# Altium PCB Jetson Nano Power -2.PcbDoc
Units mm, origin at the board's own origin, x right, y up, seen from the top; angles counter-clockwise.
Board outline 84.58 x 60.07 mm, 2 copper layers (Top Layer, Bottom Layer); 11 components, 10 nets, 32 pads, 0 vias.
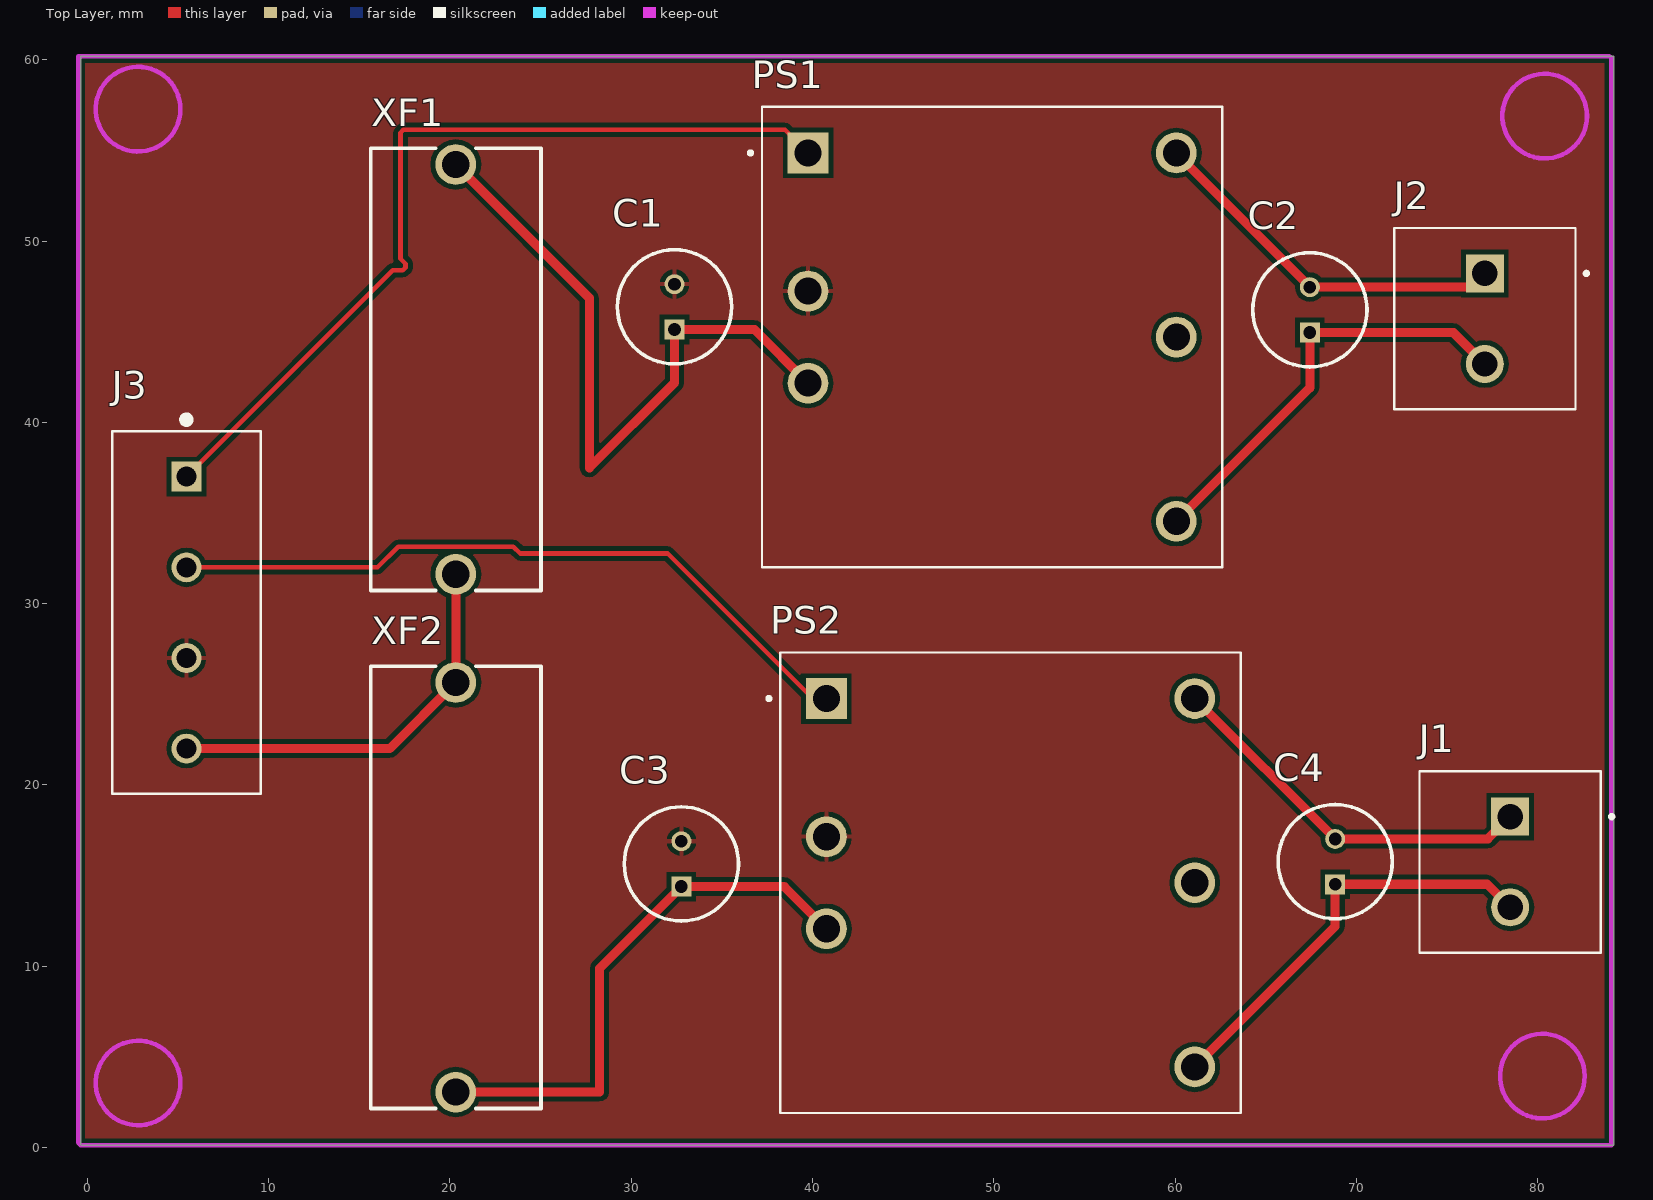
[diagram p0: Top Layer view]
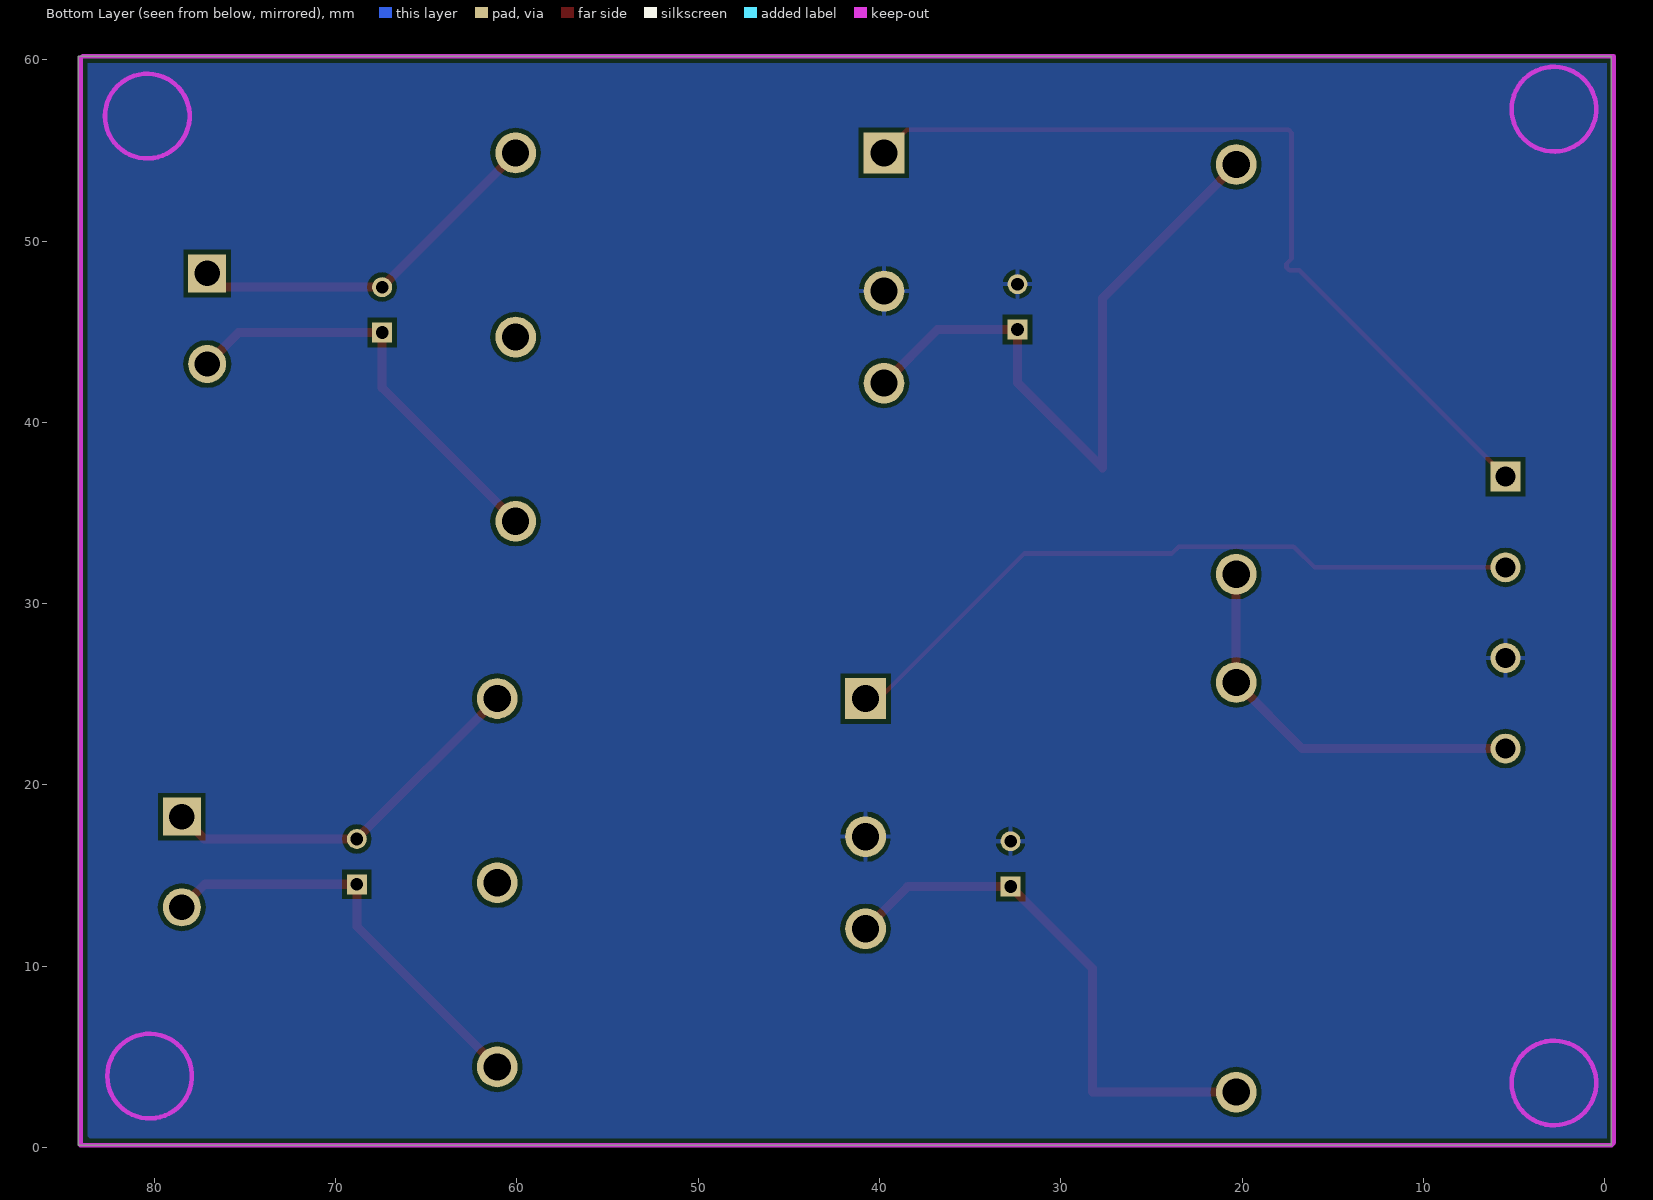
[diagram p1: Bottom Layer view, seen from below]
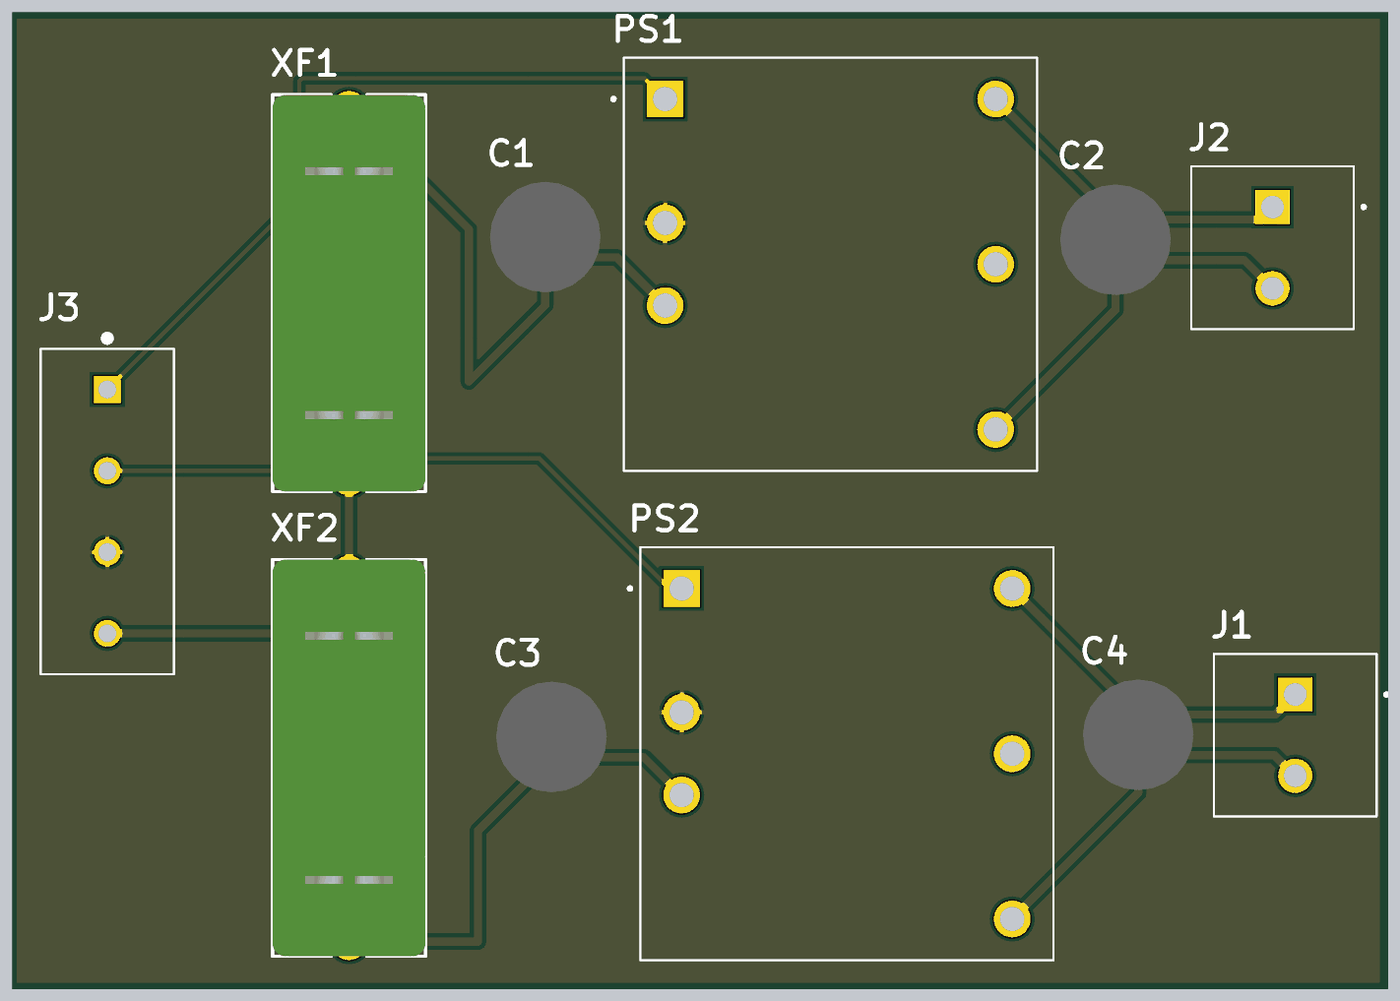
[diagram p2: 3D render of the assembled board from above, using the file's embedded part models]

## Layer stack, top to bottom
Top Solder: solder mask 0.0102, Solder Resist, Dk 3.5
Top Layer: signal copper 0.0356
Dielectric 1: dielectric 0.32, FR-4, Dk 4.8
Bottom Layer: signal copper 0.0356
Bottom Solder: solder mask 0.0102, Solder Resist, Dk 3.5

## Board outline
-0.381,0.127 84.201,0.127 84.201,60.198 -0.381,60.198

## Design rules (kind name [scope] priority, off if disabled: settings)
Clearance [All] p1: gap=0.254 ignorepadtopadclearanceinfootprint=FALSE except(0: SMDPad-Hole THPad-Hole Via-Hole Fill-Hole Poly-Hole Region-Hole Text-Hole)
PolygonConnect [All] p1: connectstyle=Relief reliefconductorwidth=0.254 reliefentries=4 polygonreliefangle="90 Angle" airgapwidth=0.254
RoutingVias [All] p1: holewidth=0.711 width=1.27 viastyle="Through Hole" minholewidth=0.711 minwidth=1.27 maxholewidth=0.711 maxwidth=1.27
SolderMaskExpansion [All] p1: expansion=0.102 istentingtop=FALSE
Width [All] p1: maxlimit=0.5 minlimit=0.254 preferedwidth=0.5 minimp=50.000000 maximp=50.000000 favimp=50.000000
30 further rules are at their usual default settings.

## Classes and differential pairs
component class "Jetson Nano Power -2": J1 J2 J3 PS1 PS2 XF1 XF2

## Components (designator, comment, footprint, x,y, rotation, side; value= is the part's Value field where it differs from the comment)
C1 "ESK107M016AE3AA" CAPPRD250W50D630H1250 32.385,45.125 r90 top
C2 "ESK107M016AE3AA" CAPPRD250W50D630H1250 67.437,44.958 r90 top
C3 "ESK107M016AE3AA" CAPPRD250W50D630H1250 32.766,14.391 r90 top
C4 "ESK107M016AE3AA" CAPPRD250W50D630H1250 68.834,14.518 r90 top
J1 "282856-2" *TE_282856-2 78.486,15.748 r270 top
J2 "282856-2" *TE_282856-2 77.089,45.72 r270 top
J3 "282836-4" *TE_282836-4 5.461,29.504 r270 top
PS1 "PDQE20-Q24-S5-D" *CONV_PDQE20-Q24-S5-D 49.911,44.704 r0 top
PS2 "PDQE20-Q24-S5-D" *CONV_PDQE20-Q24-S5-D 50.927,14.605 r0 top
XF1 "696108003002" 696108003002 20.32,42.926 r90 top
XF2 "696108003002" 696108003002 20.32,14.351 r270 top

## Footprints (in the part's own frame and the unit in brackets; to place one, negate y for a bottom-side part, rotate by r counter-clockwise, add the part's x,y. Pads: shape width x height; smd on the part's side, far side on the other; paste and mask are expansions set on the pad)
696108003002 [mm] "FUSEHOLDER BLOCKS - PCB - CLIP COVER - THT"
  round 2.25 hole 1.5: 1(-11.3,0) 2(11.3,0)
  silkscreen extent -12.2,-4.7 12.2,4.7, body extent -12.2,-4.7 12.2,4.7, height 11.55
*CONV_PDQE20-Q24-S5-D [mm]
  rect 2.25x2.25 hole 1.5: 1(-10.16,10.16)
  round 2.25 hole 1.5: 2(-10.16,2.54) 3(-10.16,-2.54) 4(10.16,-10.16) 5(10.16,0) 6(10.16,10.16)
  silkscreen extent -13.43,-12.7 12.7,12.7
*TE_282836-4 [mm]
  rect 1.65x1.65 hole 1.1: 1(-7.5,0)
  round 1.65 hole 1.1: 2(-2.5,0) 3(2.5,0) 4(7.5,0)
  silkscreen extent -10.84,-4.1 10,4.1
*TE_282856-2 [mm]
  rect 2.1x2.1 hole 1.4: 1(-2.5,0)
  round 2.1 hole 1.4: 2(2.5,0)
  silkscreen extent -5,-5 5,5.7
CAPPRD250W50D630H1250 [mm]
  rect 1.1x1.1 hole 0.7: 1(0,0)
  round 1.1 hole 0.7: 2(2.5,0)
  silkscreen extent -1.9,-3.15 4.4,3.15, body extent -2.15,-3.4 4.65,3.4, height 12.5

## Part data
C1 C2 C3 C4: "Capacitor Polarised", Manufacturer_Name=Kemet, Datasheet Link=https://api.kemet.com/component-edge/download/datasheet/ESK107M016AE3AA.pdf, Height=12.5mm, Manufacturer_Part_Number=ESK107M016AE3AA
J1 J2: "TERMI-BLOK PCB MOUNT 2P", Package=None, Availability=Unavailable, EU_RoHS_Compliance="Compliant with Exemptions", MF="TE Connectivity", MP=282856-2, Price=None, SnapEDA_Link=https://www.snapeda.com/parts/282856-2/TE%20Connectivity%20AMP%20Connectors/view-part/1809079/?ref=snap, TE_purchase_URL=https://www.te.com/usa-en/product-282856-2.html?te_bu=Cor&te_type=disp&te_campaign=seda_glo_cor-seda-global-disp-prtnr-fy19-seda-model-bom-cta_sma-317_1&elqCampaignId=32493
J3: "4 Position Wire to Board Terminal Block Horizontal with Board 0.197 _5.00mm_ Through Hole", Package=None, Availability=Unavailable, Centerline_Pitch="5 mm[.197 in]", EU_RoHS_Compliance="Compliant with Exemptions", MF="TE Connectivity", MP=282836-4, Number_of_Positions=4, Price=None, SnapEDA_Link=https://www.snapeda.com/parts/282836-4/TE%20Connectivity%20AMP%20Connectors/view-part/493249/?ref=snap, TE_purchase_URL=https://www.te.com/usa-en/product-282836-4.html?te_bu=Cor&te_type=disp&te_campaign=seda_glo_cor-seda-global-disp-prtnr-fy19-seda-model-bom-cta_sma-317_1&elqCampaignId=32493
PS1 PS2: "20 W, 4:1 Input Range, Single/Dual Regulated Output, DIP, 1500 Vdc Isolation, Dc-Dc Converter", Package="DIP-6 CUI Inc.", CUI_purchase_URL=https://www.cui.com/product/dc-dc-converters/isolated/pdqe20-d-series?utm_source=snapeda.com&utm_medium=referral&utm_campaign=snapedaBOM, Digi-Key_Part_Number=102-6267-ND, Digi-Key_Purchase_URL=https://www.digikey.com/product-detail/en/cui-inc/PDQE20-Q24-S5-D/102-6267-ND/10230156?utm_source=snapeda&utm_medium=aggregator&utm_campaign=symbol, MF="CUI Inc.", MP=PDQE20-Q24-S5-D, SnapEDA_Link=https://www.snapeda.com/parts/PDQE20-Q24-S5-D/CUI/view-part/3740268/?ref=snap
XF1 XF2: library part CMP-1502-00237-1, "WR-FSH Fuse Holder Blocks Fuse Holder Blocks Clip Cover for PCB", Manufacturer="Wurth Elektronik", Operating Temperature=-30to120degC, Datasheet URL=https://katalog.we-online.de/em/datasheet/696108003002.pdf, Fuse Size=5x20mm, Manufacturer URL=http://www.we-online.de, Mounting Technology=THT, Package Reference=696108003002, Packaging=Box, Part Number=696108003002, Publisher=WurthElektronik

## Nets (pads, with @x,y where several pads share a name; then routed paths per layer and width w, separated by ;. In a path a pad name is that pad's centre, name@x,y a point inside that pad or via, vN(x,y) a via of type N, cw(c..) or ccw(c..) an arc to the next point about the centre after c; other vN are vias at no path point)
GND: C1.2 C3.2 J3.3 PS1.2 PS2.2 | length 0.7
  Top Layer w0.254: J3.3@5.351,26.894 J3.3 ; PS1.2@39.664,47.331 PS1.2 PS1.2@40.132,47.244 ; PS2.2@39.981,17.169 PS2.2@40.005,17.145
NetC1_1: C1.1 PS1.3 XF1.2 | length 38
  Top Layer w0.5: XF1.2 27.686,46.86 27.686,37.487 32.385,42.186 C1.1 36.79,45.125 PS1.3
NetC2_1: C2.1 J2.2 PS1.4 | length 23.8
  Top Layer w0.5: PS1.4 67.437,41.91 C2.1 75.351,44.958 J2.2
NetC2_2: C2.2 J2.1 PS1.6 | length 20.4
  Top Layer w0.5: PS1.6 60.071,54.844 67.437,47.478 C2.2 76.327,47.458 J2.1
NetC3_1: C3.1 PS2.3 XF2.2 | length 30.1
  Top Layer w0.5: XF2.2 28.244,3.051 28.244,9.869 C3.1 38.441,14.391 PS2.3
NetC4_1: C4.1 J1.2 PS2.4 | length 23.5
  Top Layer w0.5: PS2.4 68.834,12.192 C4.1 77.21,14.518 78.48,13.248 J1.2
NetC4_2: C4.2 J1.1 PS2.6 | length 21.1
  Top Layer w0.5: PS2.6 C4.2 77.256,17.018 J1.1
NetJ3_1: J3.1 PS1.1 | length 47.5
  Top Layer w0.254: J3.1 16.844,48.387 17.399,48.387 17.548,48.536 17.548,48.746 17.272,49.022 17.272,55.985 17.421,56.134 38.481,56.134 PS1.1
NetJ3_2: J3.2 PS2.1 | length 38.5
  Top Layer w0.254: J3.2 16.002,32.004 17.145,33.147 23.495,33.147 23.876,32.766 32.004,32.766 PS2.1@40.005,24.765
NetJ3_4: J3.4 XF1.1 XF2.1 | length 22.3
  Top Layer w0.5: J3.4 16.673,22.004 XF2.1 XF1.1
pads on no net: PS1.5 PS2.5

## Polygon pours and split planes (outlines as drawn)
GND on Top Layer "GND_L01_P001" (solid, pour order 1): -0.381,60.325 84.074,60.325 84.201,60.198 84.201,0 0,0 -0.381,0.381
GND on Bottom Layer "GND bottom" (solid, pour order 2): -0.254,59.944 -0.127,59.817 83.693,59.817 83.693,0.635 83.566,0.508 -0.254,0.508 -0.254,4.953 -0.762,5.461 -0.127,5.461

## Keep-outs
Keep-Out Layer:
  circle w0.254: c80.391,56.896 r2.335
  circle w0.254: c80.264,3.937 r2.335
  circle w0.254: c2.794,3.556 r2.335
  circle w0.254: c2.794,57.277 r2.335
  lines w0.254: -0.508,0.254 -0.508,60.198 83.947,60.198 84.074,60.071 84.074,0.127 -0.381,0.127 -0.508,0.254